# EAGLE board panel (EAGLE 6.3)
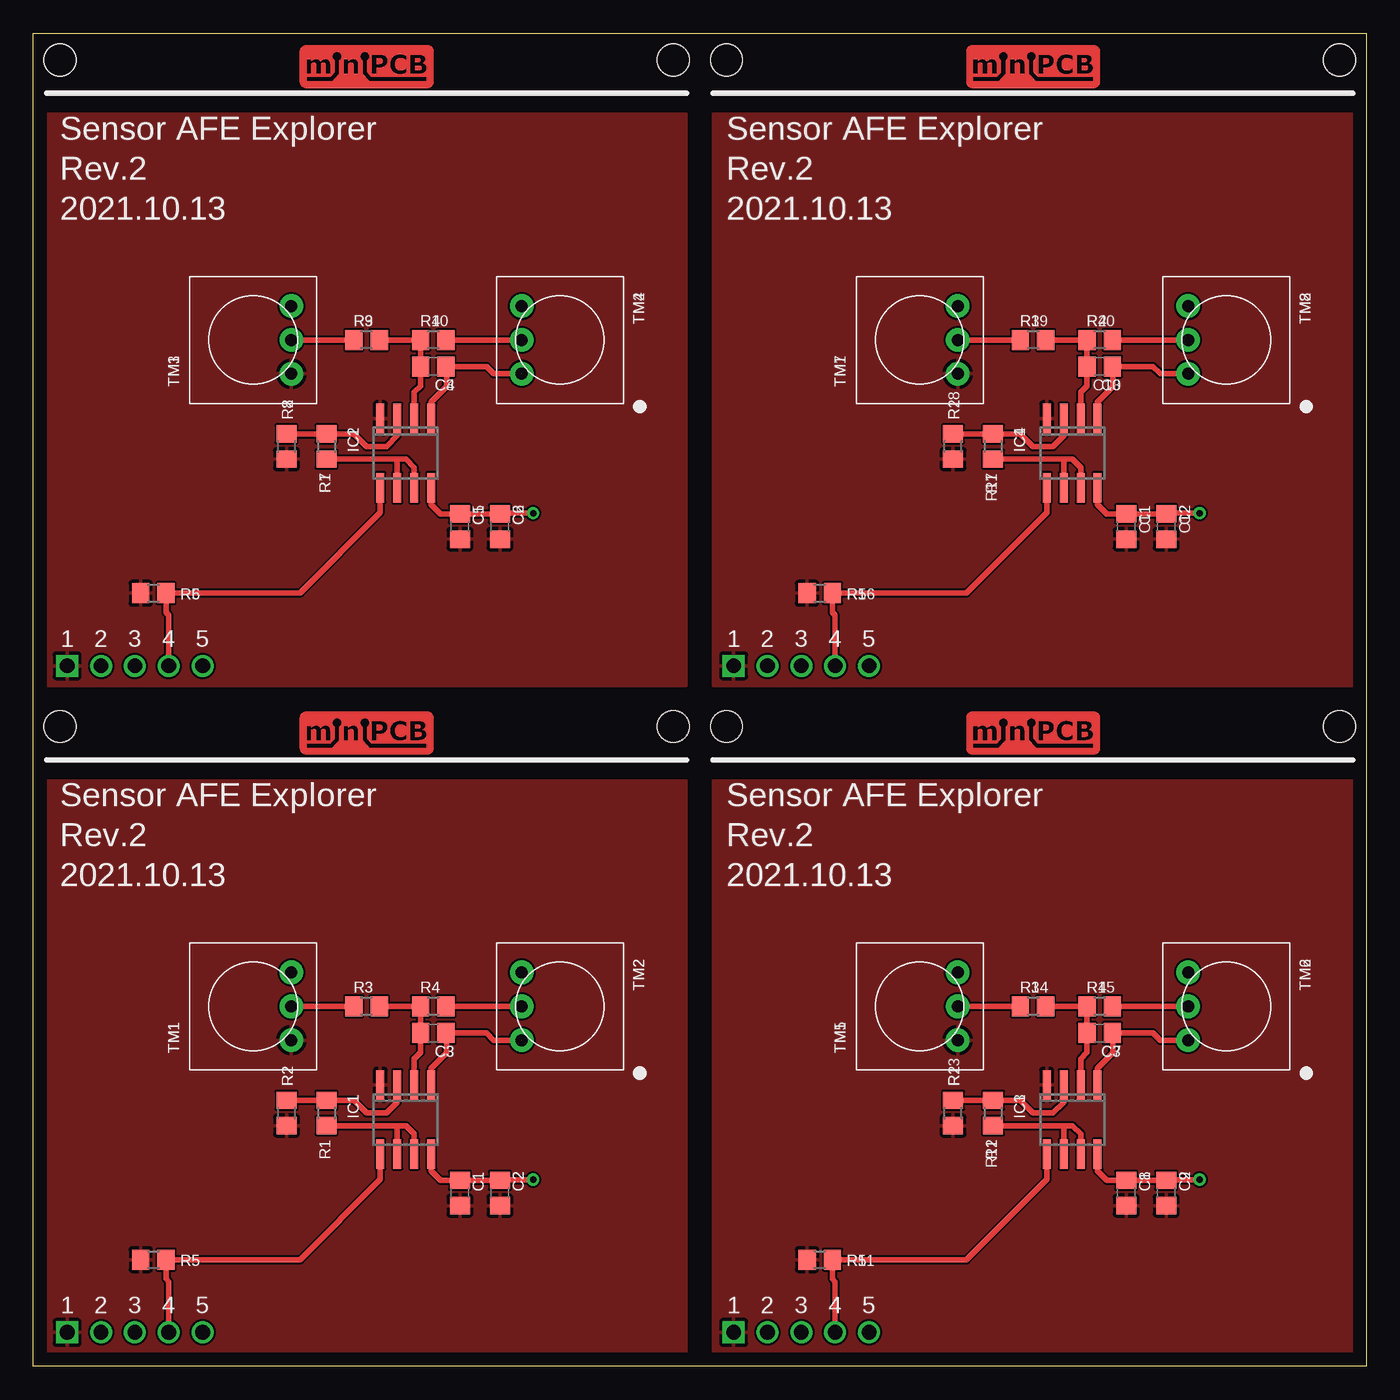
[diagram p0: board, top side]
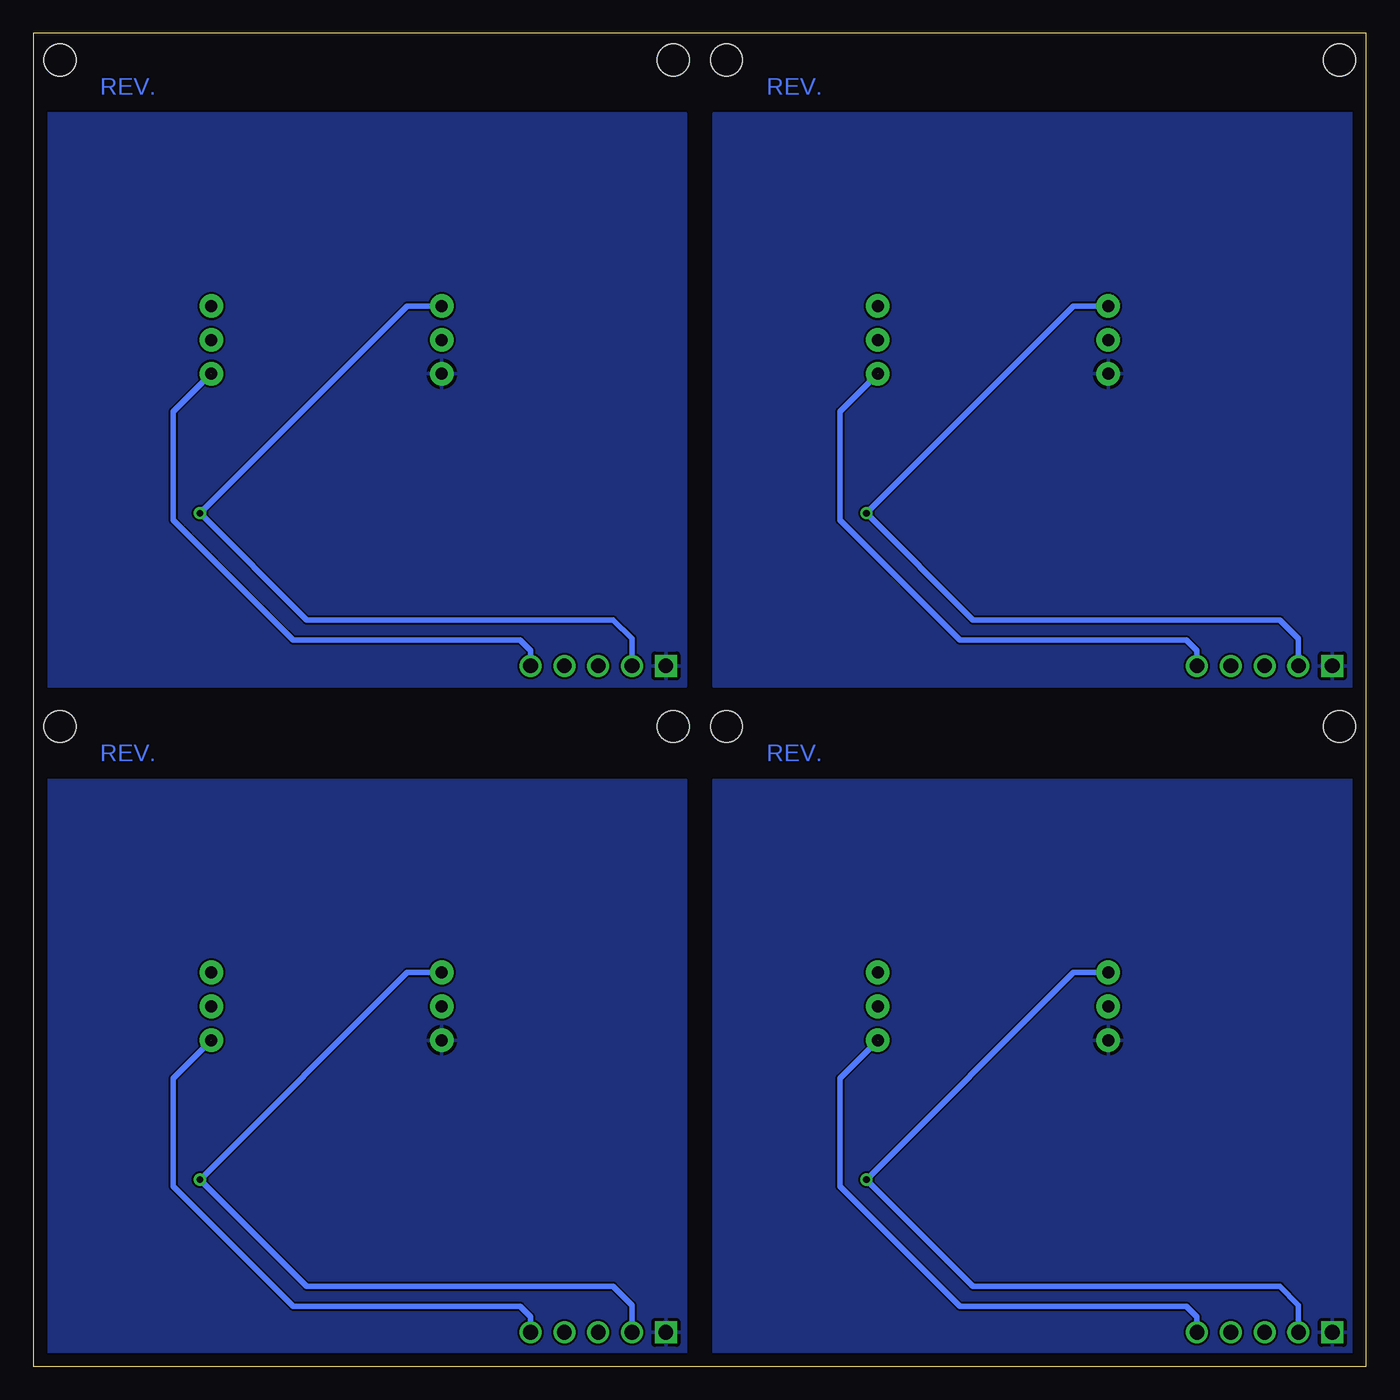
[diagram p1: board, bottom side, seen from below]

Size 100 x 100 mm. Coordinates in mm from the lower left corner, seen from the top.
Outline: 0,0 0,100 100,100 100,0 0,0
Copper layers (1*16): Top 0.035mm / dielectric 1.5mm / Bottom 0.035mm
Design rules "default": minimum track width 6mil, minimum drill 0.35mm, track to track 6mil, track to pad 6mil, pad to pad 6mil, via to via 6mil, smd to smd 6mil, copper to edge 40mil, drill to drill 6mil, minimum pad ring 10mil, minimum via ring 8mil, stop-mask expansion 4mil, vias tented up to drill 0mil, thermal gap 10mil

## Footprints (pad centres in the part's own frame; a part is rotated, then mirrored left to right if it is on the bottom)
C0805 = smd 1.3 x 1.5: 1 -0.95,0; 2 0.95,0
SO8 = smd 0.6 x 2.2: 1 -1.905,-2.6; 2 -0.635,-2.6; 3 0.635,-2.6; 4 1.905,-2.6; 5 1.905,2.6; 6 0.635,2.6; 7 -0.635,2.6; 8 -1.905,2.6
MINIPCB_50X50MM = drill 1.1 square: 1 2.54,2.54 | drill 1.1: 2 5.08,2.54; 3 7.62,2.54; 4 10.16,2.54; 5 12.7,2.54 | hole 2.4: 48,48; 2,48
R0805 = smd 1.3 x 1.5: 1 -0.95,0; 2 0.95,0
TRIM-3386 = drill 0.9 pad 1.778: 1 -2.54,-2.857; 2 0,-2.857; 3 2.54,-2.857

## Placement (x,y rotation side)
C1  [C0805]  32,13 270 top
C2  [C0805]  35,13 270 top
C3  [C0805]  30,25 180 top
C4  [C0805]  30,75 180 top
C5  [C0805]  32,63 270 top
C6  [C0805]  35,63 270 top
C7  [C0805]  80,25 180 top
C8  [C0805]  82,13 270 top
C9  [C0805]  85,13 270 top
C10  [C0805]  80,75 180 top
C11  [C0805]  82,63 270 top
C12  [C0805]  85,63 270 top
IC1  AD8542R  [SO8]  27.94,18.51 180 top
IC2  AD8542R  [SO8]  27.94,68.51 180 top
IC3  AD8542R  [SO8]  77.94,18.51 180 top
IC4  AD8542R  [SO8]  77.94,68.51 180 top
J1.  [MINIPCB_50X50MM]  0,0 0 top
J1.1  [MINIPCB_50X50MM]  0,50 0 top
J1.2  [MINIPCB_50X50MM]  50,0 0 top
J1.3  [MINIPCB_50X50MM]  50,50 0 top
R1  [R0805]  22,19 270 top
R2  [R0805]  19,19 90 top
R3  [R0805]  25,27 180 top
R4  [R0805]  30,27 180 top
R5  50  [R0805]  9,8 0 top
R6  50  [R0805]  9,58 0 top
R7  [R0805]  22,69 270 top
R8  [R0805]  19,69 90 top
R9  [R0805]  25,77 180 top
R10  [R0805]  30,77 180 top
R11  50  [R0805]  59,8 0 top
R12  [R0805]  72,19 270 top
R13  [R0805]  69,19 90 top
R14  [R0805]  75,27 180 top
R15  [R0805]  80,27 180 top
R16  50  [R0805]  59,58 0 top
R17  [R0805]  72,69 270 top
R18  [R0805]  69,69 90 top
R19  [R0805]  75,77 180 top
R20  [R0805]  80,77 180 top
TM1  [TRIM-3386]  16.5,27 90 top
TM2  [TRIM-3386]  39.5,27 270 top
TM3  [TRIM-3386]  16.5,77 90 top
TM4  [TRIM-3386]  39.5,77 270 top
TM5  [TRIM-3386]  66.5,27 90 top
TM6  [TRIM-3386]  89.5,27 270 top
TM7  [TRIM-3386]  66.5,77 90 top
TM8  [TRIM-3386]  89.5,77 270 top

## Library data of the parts
C1-C12 TM1-TM8 = nolan-utsa
IC1-IC4 = analog-devices; MF: ALTERA CORPORATION; MPN: AD8542ARZ-REEL; OC_FARNELL: 1424150; OC_NEWARK: 59K6827
J1. J1.1-J1.3 = minipcb; PART_NUMBER: AFE Explorer; REVISION: 2
R1-R20 = minipcb

## Nets
GND: C1.2 C2.2 IC1.4 J1..1 R2.1 R5.1 TM1.1
GND1: C5.2 C6.2 IC2.4 J1.1.1 R6.1 R8.1 TM3.1
GND2: C8.2 C9.2 IC3.4 J1.2.1 R11.1 R13.1 TM5.1
GND3: C11.2 C12.2 IC4.4 J1.3.1 R16.1 R18.1 TM7.1
N$1: IC1.5 J1..4 R5.2
N$2: IC1.6 IC1.7 R1.2
N$3: IC1.3 R1.1 R2.2
N$4: C3.2 IC1.2 R3.1 R4.2
N$5: J1..3
N$6: R3.2 TM1.2
N$7: C3.1 IC1.1 J1..5 TM2.3
N$9: R4.1 TM2.2
N$10: J1.1.3
N$11: IC2.5 J1.1.4 R6.2
N$12: IC2.6 IC2.7 R7.2
N$13: IC2.3 R7.1 R8.2
N$14: C4.2 IC2.2 R9.1 R10.2
N$16: R9.2 TM3.2
N$17: C4.1 IC2.1 J1.1.5 TM4.3
N$18: R10.1 TM4.2
N$19: J1.2.3
N$20: IC3.5 J1.2.4 R11.2
N$21: IC3.6 IC3.7 R12.2
N$22: IC3.3 R12.1 R13.2
N$24: C7.2 IC3.2 R14.1 R15.2
N$25: R14.2 TM5.2
N$26: C7.1 IC3.1 J1.2.5 TM6.3
N$27: R15.1 TM6.2
N$28: J1.3.3
N$29: IC4.5 J1.3.4 R16.2
N$30: IC4.6 IC4.7 R17.2
N$32: IC4.3 R17.1 R18.2
N$33: C10.2 IC4.2 R19.1 R20.2
N$34: R19.2 TM7.2
N$35: C10.1 IC4.1 J1.3.5 TM8.3
N$36: R20.1 TM8.2
V+: C1.1 C2.1 IC1.8 J1..2 TM1.3
V+1: C5.1 C6.1 IC2.8 J1.1.2 TM3.3
V+2: C8.1 C9.1 IC3.8 J1.2.2 TM5.3
V+3: C11.1 C12.1 IC4.8 J1.3.2 TM7.3

## Tracks (layer width: path | path; a pad name or v marks a point on that pad's centre or on a via)
GND
  pour Top: 1,1 1,44 49,44 49,1
  pour Bottom: 1,1 1,44 49,44 49,1
GND1
  pour Top: 1,51 1,94 49,94 49,51
  pour Bottom: 1,51 1,94 49,94 49,51
GND2
  pour Top: 51,1 51,44 99,44 99,1
  pour Bottom: 51,1 51,44 99,44 99,1
GND3
  pour Top: 51,51 51,94 99,94 99,51
  pour Bottom: 51,51 51,94 99,94 99,51
N$1
  Top 0.406: J1..4 10.16,6.34 9.95,6.55 R5.2 20,8 26.04,14.04 IC1.5
N$2
  Top 0.406: IC1.7 28.57,17.43 27.95,18.05 27.3,18.05 | R1.2 27,18.05 27.3,18.05 | IC1.6 27.3,18.05
N$3
  Top 0.406: R2.2 R1.1 24.05,19.95 25,19 26.5,19 27.3,19.8 IC1.3
N$4
  Top 0.406: R3.1 R4.2 C3.2 29.05,23.55 28.57,23.07 IC1.2
N$6
  Top 0.406: R3.2 TM1.2
N$7
  Top 0.406: IC1.1 29.84,22.34 31,23.5 31,24.95 C3.1 34,25 34.54,24.46 TM2.3
  Bottom 0.406: J1..5 12.7,3.7 13.5,4.5 30.5,4.5 39.5,13.5 39.5,21.6 TM2.3
N$8  (1 unrouted)
N$9
  Top 0.406: R4.1 TM2.2
N$11
  Top 0.406: J1.1.4 10.16,56.34 9.95,56.55 R6.2 20,58 26.04,64.03 IC2.5
N$12
  Top 0.406: IC2.7 28.57,67.42 27.95,68.05 27.3,68.05 | R7.2 27,68.05 27.3,68.05 | IC2.6 27.3,68.05
N$13
  Top 0.406: R8.2 R7.1 24.05,69.95 25,69 26.5,69 27.3,69.81 IC2.3
N$14
  Top 0.406: R9.1 R10.2 C4.2 29.05,73.55 28.57,73.08 IC2.2
N$15  (1 unrouted)
N$16
  Top 0.406: R9.2 TM3.2
N$17
  Top 0.406: IC2.1 29.84,72.34 31,73.5 31,74.95 C4.1 34,75 34.54,74.46 TM4.3
  Bottom 0.406: J1.1.5 12.7,53.7 13.5,54.5 30.5,54.5 39.5,63.5 39.5,71.6 TM4.3
N$18
  Top 0.406: R10.1 TM4.2
N$20
  Top 0.406: J1.2.4 60.16,6.34 59.95,6.55 R11.2 70,8 76.03,14.04 IC3.5
N$21
  Top 0.406: IC3.7 78.58,17.43 77.95,18.05 77.31,18.05 | R12.2 77,18.05 77.31,18.05 | IC3.6 77.31,18.05
N$22
  Top 0.406: R13.2 R12.1 74.05,19.95 75,19 76.5,19 77.31,19.8 IC3.3
N$23  (1 unrouted)
N$24
  Top 0.406: R14.1 R15.2 C7.2 79.05,23.55 78.58,23.07 IC3.2
N$25
  Top 0.406: R14.2 TM5.2
N$26
  Top 0.406: IC3.1 79.84,22.34 81,23.5 81,24.95 C7.1 84,25 84.54,24.46 TM6.3
  Bottom 0.406: J1.2.5 62.7,3.7 63.5,4.5 80.5,4.5 89.5,13.5 89.5,21.6 TM6.3
N$27
  Top 0.406: R15.1 TM6.2
N$29
  Top 0.406: J1.3.4 60.16,56.34 59.95,56.55 R16.2 70,58 76.03,64.03 IC4.5
N$30
  Top 0.406: IC4.7 78.58,67.42 77.95,68.05 77.31,68.05 | R17.2 77,68.05 77.31,68.05 | IC4.6 77.31,68.05
N$31  (1 unrouted)
N$32
  Top 0.406: R18.2 R17.1 74.05,69.95 75,69 76.5,69 77.31,69.81 IC4.3
N$33
  Top 0.406: R19.1 R20.2 C10.2 79.05,73.55 78.58,73.08 IC4.2
N$34
  Top 0.406: R19.2 TM7.2
N$35
  Top 0.406: IC4.1 79.84,72.34 81,73.5 81,74.95 C10.1 84,75 84.54,74.46 TM8.3
  Bottom 0.406: J1.3.5 62.7,53.7 63.5,54.5 80.5,54.5 89.5,63.5 89.5,71.6 TM8.3
N$36
  Top 0.406: R20.1 TM8.2
V+  (via drill 0.5)
  Top 0.406: v37.5,14 35.05,14 C2.1 C1.1 30.55,13.95 29.84,14.65 IC1.8
  Bottom 0.406: J1..2 5.08,4.58 6.5,6 29.5,6 v37.5,14 21.96,29.54 TM1.3
V+1  (via drill 0.5)
  Top 0.406: v37.5,64 35.05,64 C6.1 C5.1 30.55,63.95 29.84,64.66 IC2.8
  Bottom 0.406: J1.1.2 5.08,54.58 6.5,56 29.5,56 v37.5,64 21.96,79.54 TM3.3
V+2  (via drill 0.5)
  Top 0.406: v87.5,14 85.05,14 C9.1 C8.1 80.55,13.95 79.84,14.65 IC3.8
  Bottom 0.406: J1.2.2 55.08,4.58 56.5,6 79.5,6 v87.5,14 71.96,29.54 TM5.3
V+3  (via drill 0.5)
  Top 0.406: v87.5,64 85.05,64 C12.1 C11.1 80.55,63.95 79.84,64.66 IC4.8
  Bottom 0.406: J1.3.2 55.08,54.58 56.5,56 79.5,56 v87.5,64 71.96,79.54 TM7.3

## Text on the board
tPlace: Sensor AFE Explorer | Sensor AFE Explorer | Rev.2 | Rev.2 | 2021.10.13 | 2021.10.13 | Sensor AFE Explorer | Sensor AFE Explorer | Rev.2 | Rev.2 | 2021.10.13 | 2021.10.13
_tNames: TM2 | TM2 | R3 | R4 | R3 | R4 | C3 | C3 | TM1 | TM1 | R2 | R2 | IC1 | IC1 | R1 | R1 | C1 | C2 | C1 | C2 | R5 | R5 | TM2 | TM2 | R3 | R4 | R3 | R4 | C3 | C3 | TM1 | TM1 | R2 | R2 | IC1 | IC1 | R1 | R1 | C1 | C2 | C1 | C2 | R5 | R5